# EAGLE board circuito v6 (EAGLE 9.4.2)

Size 90.5 x 59.5 mm. Coordinates in mm from the lower left corner, seen from the top.
Outline: 0,0 90.5,0 90.5,59.5 0,59.5 0,0
Copper layers (1*16): Top 0.035mm / dielectric 1.5mm / Bottom 0.035mm
Design rules "default *": minimum track width 40mil, minimum drill 24mil, track to track 15mil, track to pad 15mil, pad to pad 15mil, via to via 15mil, smd to smd 8mil, copper to edge 40mil, drill to drill 8mil, minimum pad ring 10mil, minimum via ring 20mil, stop-mask expansion 4mil, vias tented up to drill 0mil, thermal gap 10mil
Net classes: 1 vcc: width 0.305 mm
tRestrict: area 50.2,16.8 to 52.2,18.8; area 52.8,16.8 to 54.8,18.8; area 55.2,16.8 to 57.2,18.8; area 70.8,16.8 to 72.8,18.8; area 73.2,16.8 to 75.2,18.8; area 75.8,16.8 to 77.8,18.8; area 28.2,19.2 to 28.2,22.8; area 30.2,33 to 48.2,37.5; area 30.2,25.2 to 48.2,29.5; area 3.2,54.5 to 6.5,57.5; area 8.5,54.5 to 11.5,57.5; area 3.2,49.5 to 6.5,52.5; 19 more areas
bRestrict: area 25.2,4.5 to 32.2,8; area 58.8,4.2 to 70,8; area 78.8,9.5 to 83,20.8; area 78.8,24.8 to 83,36; area 14,52.8 to 28,56.5; area 30.8,52.8 to 47.2,56.5; area 48.8,27.5 to 54.5,36
vRestrict: area 50.5,48 to 75.5,59.2; area 78.5,38.2 to 90.5,50.5; area 48.8,0.2 to 58.5,11.8; area 69.5,0.2 to 79.5,11.8; area 48.8,14.2 to 58.8,19.2; area 69.2,14.2 to 79.2,19.2; area 0,3.5 to 13.8,59.2; area 30.2,29.5 to 48.2,33; area 55.8,30 to 67.8,32.2

## Footprints (pad centres in the part's own frame; a part is rotated, then mirrored left to right if it is on the bottom)
C025-030X050 = drill 0.813 octagon: 1 -1.27,0; 2 1.27,0
DIL14 = drill 0.813 long: 1 -7.62,-3.81; 2 -5.08,-3.81; 3 -2.54,-3.81; 4 0,-3.81; 5 2.54,-3.81; 6 5.08,-3.81; 7 7.62,-3.81; 8 7.62,3.81; 9 5.08,3.81; 10 2.54,3.81; 11 0,3.81; 12 -2.54,3.81; 13 -5.08,3.81; 14 -7.62,3.81
LED_LD260 = drill 0.813 octagon: A -1.27,0; K 1.27,0
1503_09 = drill 0.8 pad 1.2 long: 1 0,-2.1; 2 -4.55,-5.4; 3 5.05,-9.9; 4 -4,-13.1; 5 2.65,-8.5
1X01 = drill 1.016 octagon: 1 0,0
0207/7 = drill 0.813 octagon: 1 -3.81,0; 2 3.81,0
3RP/1610G = drill 1.2 pad 2.184: 1-1 -5,0; 1-2 0,0; 1-3 5,0; 2-1 -5,5; 2-2 0,5; 2-3 5,5
RTRIM64W = drill 0.61: 1 1.27,-2.54; 2 1.27,0; 3 1.27,2.54
320-916 = drill 2.007 long: 1 0,4.013; 2 0,0; 3 0,-4.013
L03P = drill 1.016 long: 1 2.5,-6.25; 2 0,-6.25; 3 -2.5,-6.25
L02P = drill 1.016 long: 1 1.25,-6.25; 2 -1.25,-6.25
SCD-014-A = drill 1 pad 2 long: 1 -2.5,13.8; 2 -2.5,7.5; 3 2.5,10.8

## Placement (x,y rotation side)
C1  10micro  [C025-030X050]  73.75,36.5 0 top
IC1  LM324N  [DIL14]  39.25,31.25 180 top
LED1  [LED_LD260]  73.75,30.25 180 top
LED2  [LED_LD260]  73.75,27.25 180 top
PHONES  1503_09  [1503_09]  0,18.5 90 top
PIN2  [1X01]  45.42,54.67 0 top
PIN5  [1X01]  37.8,54.67 0 top
PIN6  [1X01]  35.13,54.67 0 top
PIN7  [1X01]  32.59,54.67 0 top
PIN9  [1X01]  26.3,54.5 0 top
PIN10  [1X01]  23.63,54.5 0 top
PIN11  [1X01]  20.92,54.5 0 top
PIN12  [1X01]  18.25,54.5 0 top
PIN36  [1X01]  80.9,34.22 0 top
PIN38  [1X01]  80.9,31.64 0 top
PIN40  [1X01]  80.9,29.09 0 top
PIN42  [1X01]  80.85,26.55 0 top
PINA8  [1X01]  60.62,6.25 0 top
PINA9  [1X01]  63.17,6.25 0 top
PINGND1  [1X01]  80.9,11.25 0 top
PINGND2  [1X01]  27.5,6.25 0 top
PINGND3  [1X01]  30,6.25 0 top
PINVACIO1  [1X01]  40.25,54.65 180 top
PINVACIO2  [1X01]  42.75,54.65 180 top
PINVACIO3  [1X01]  15.75,54.5 0 top
PINVACIO4  [1X01]  80.9,13.92 0 top
PINVACIO5  [1X01]  80.9,16.47 0 top
PINVACIO6  [1X01]  80.9,19 0 top
PINVACIO7  [1X01]  68.25,6.25 180 top
PINVACIO8  [1X01]  65.75,6.25 180 top
R1  100k  [0207/7]  59,42.5 180 top
R2  100k  [0207/7]  69.25,42.5 180 top
R3  100k  [3RP/1610G]  5,33.5 270 top
R4  100k  [3RP/1610G]  5,51 270 top
R5  100k  [0207/7]  32,18.5 90 top
R6  100k  [0207/7]  45,18.5 270 top
R7  100k  [0207/7]  38.75,18.5 90 top
R8  100k  [0207/7]  19.5,24 180 top
R9  100k  [0207/7]  14.75,46.75 270 top
R10  100k  [0207/7]  19.5,29.75 180 top
R11  100k  [0207/7]  33.25,44 180 top
R12  100k  [0207/7]  29.25,50 270 top
R13  100k  [0207/7]  47.25,41.75 180 top
R14  100k  [0207/7]  19.25,35.75 0 top
R15  100k  [0207/7]  25.75,32.5 90 top
R16  100k  [0207/7]  19.5,18 0 top
R17  100k  [0207/7]  21,43 180 top
R18  100k  [0207/7]  25.75,13 180 top
R19  100k  [0207/7]  33.25,39.25 180 top
R20  100k  [0207/7]  20.75,50.5 180 top
R21  220  [0207/7]  88.5,30.5 270 top
R22  220  [0207/7]  85.5,27.75 270 top
R23  10k  [0207/7]  60.5,14 270 top
R24  10k  [RTRIM64W]  53.75,16.5 90 top
R25  10k  [0207/7]  67.5,14 270 top
R26  10k  [RTRIM64W]  74.25,16.5 90 top
S2  [320-916]  61.75,26.5 270 top
S3  [320-916]  61.75,35.5 270 top
SCH1  [L03P]  84.5,44.5 270 top
SCH2  [L03P]  56.5,53.75 0 top
SCH3  [L03P]  69.25,53.75 0 top
SV1  [L02P]  53.75,5.75 180 top
SV2  [L02P]  74.5,5.75 180.2 top
X1  [SCD-014-A]  0,7.75 270 top

## Library data of the parts
C1 = rcl; SPICEPREFIX: C
IC1 = linear; SPICEPREFIX: X
LED1 LED2 = eagle-ltspice; SPICEMODEL: DMOD; SPICEPREFIX: D; SPICETYPE: diode
PHONES = con-lumberg; OC_FARNELL: 1243244; OC_NEWARK: unknown; SPICEPREFIX: X
PIN2 PIN5-PIN7 PIN9-PIN12 PIN36 PIN38 PIN40 PIN42 PINA8 PINA9 PINGND1-PINGND3 PINVACIO1-PINVACIO8 = pinhead; SPICEPREFIX: X
R1 R2 R5-R23 R25 = rcl; SPICEPREFIX: R
R3 R4 = pot; SPICEPREFIX: J
R24 R26 = rcl; SPICEMODEL: X; SPICEPREFIXL: POT
S2 S3 = switch; SPICEPREFIX: J
SCH1-SCH3 SV1 SV2 = con-amp-mt; OC_FARNELL: unknown; OC_NEWARK: unknown; SPICEPREFIX: X
X1 = con-shiua-chyuan; OC_FARNELL: unknown; OC_NEWARK: unknown; SPICEPREFIX: X

## Nets
GND: C1.2 IC1.11 LED1.K LED2.K PINGND1.1 PINGND2.1 PINGND3.1 R2.1 R24.2 R26.2 SCH1.3 SCH2.3 SCH3.3 X1.2
N$1: C1.1 IC1.3 R1.1 R2.2
N$2: R25.1 R26.3
N$3: PIN12.1 R9.1
N$4: IC1.6 R3.1-2 R4.2-1 R7.1 R10.1
N$5: R5.2 R6.2 R7.2
N$6: R6.1 S2.2
N$7: PIN5.1 S2.1
N$8: IC1.1 IC1.2 IC1.5 IC1.10 PHONES.1 R5.1 R8.1 R11.1 R14.1 R16.1 R19.1
N$9: R8.2 R9.2 R10.2
N$11: R4.2-2 R11.2 R12.2
N$12: PIN10.1 R12.1
N$13: IC1.9 R3.2-2 R4.1-1 R15.1 R18.1
N$14: R13.2 R14.2 R15.2
N$15: R13.1 S3.2
N$16: PIN2.1 S3.1
N$18: R4.1-2 R19.2 R20.2
N$19: R16.2 R17.2 R18.2
N$20: PIN11.1 R17.1
N$21: PIN9.1 R20.1
N$22: PIN42.1 SCH1.2
N$23: PIN40.1 SCH1.1
N$24: LED1.A R21.2
N$25: PIN36.1 R21.1
N$26: LED2.A R22.2
N$27: PIN38.1 R22.1
N$28: PIN7.1 SCH3.2
N$29: PIN6.1 SCH2.2
N$30: IC1.8 PHONES.2 R3.2-1
N$31: PINA8.1 R23.2 SV1.1
N$32: R23.1 R24.3
N$34: PINA9.1 R25.2 SV2.1
N$37: IC1.7 PHONES.3 R3.1-1
VCC: IC1.4 R1.2 SCH2.1 SCH3.1 SV1.2 SV2.2 X1.3

## Tracks (layer width: path | path; a pad name or v marks a point on that pad's centre or on a via)
GND  (13 unrouted)
N$1  (3 unrouted)
N$2  (1 unrouted)
N$3  (1 unrouted)
N$4  (4 unrouted)
N$5  (2 unrouted)
N$6  (1 unrouted)
N$7  (1 unrouted)
N$8  (10 unrouted)
N$9  (2 unrouted)
N$11  (2 unrouted)
N$12  (1 unrouted)
N$13  (4 unrouted)
N$14  (2 unrouted)
N$15  (1 unrouted)
N$16  (1 unrouted)
N$18  (2 unrouted)
N$19  (2 unrouted)
N$20  (1 unrouted)
N$21  (1 unrouted)
N$22  (1 unrouted)
N$23  (1 unrouted)
N$24  (1 unrouted)
N$25  (1 unrouted)
N$26  (1 unrouted)
N$27  (1 unrouted)
N$28  (1 unrouted)
N$29  (1 unrouted)
N$30  (2 unrouted)
N$31  (2 unrouted)
N$32  (1 unrouted)
N$34  (2 unrouted)
N$37  (2 unrouted)
VCC  (6 unrouted)